# EAGLE board Brainstorm (EAGLE 9.0.1)
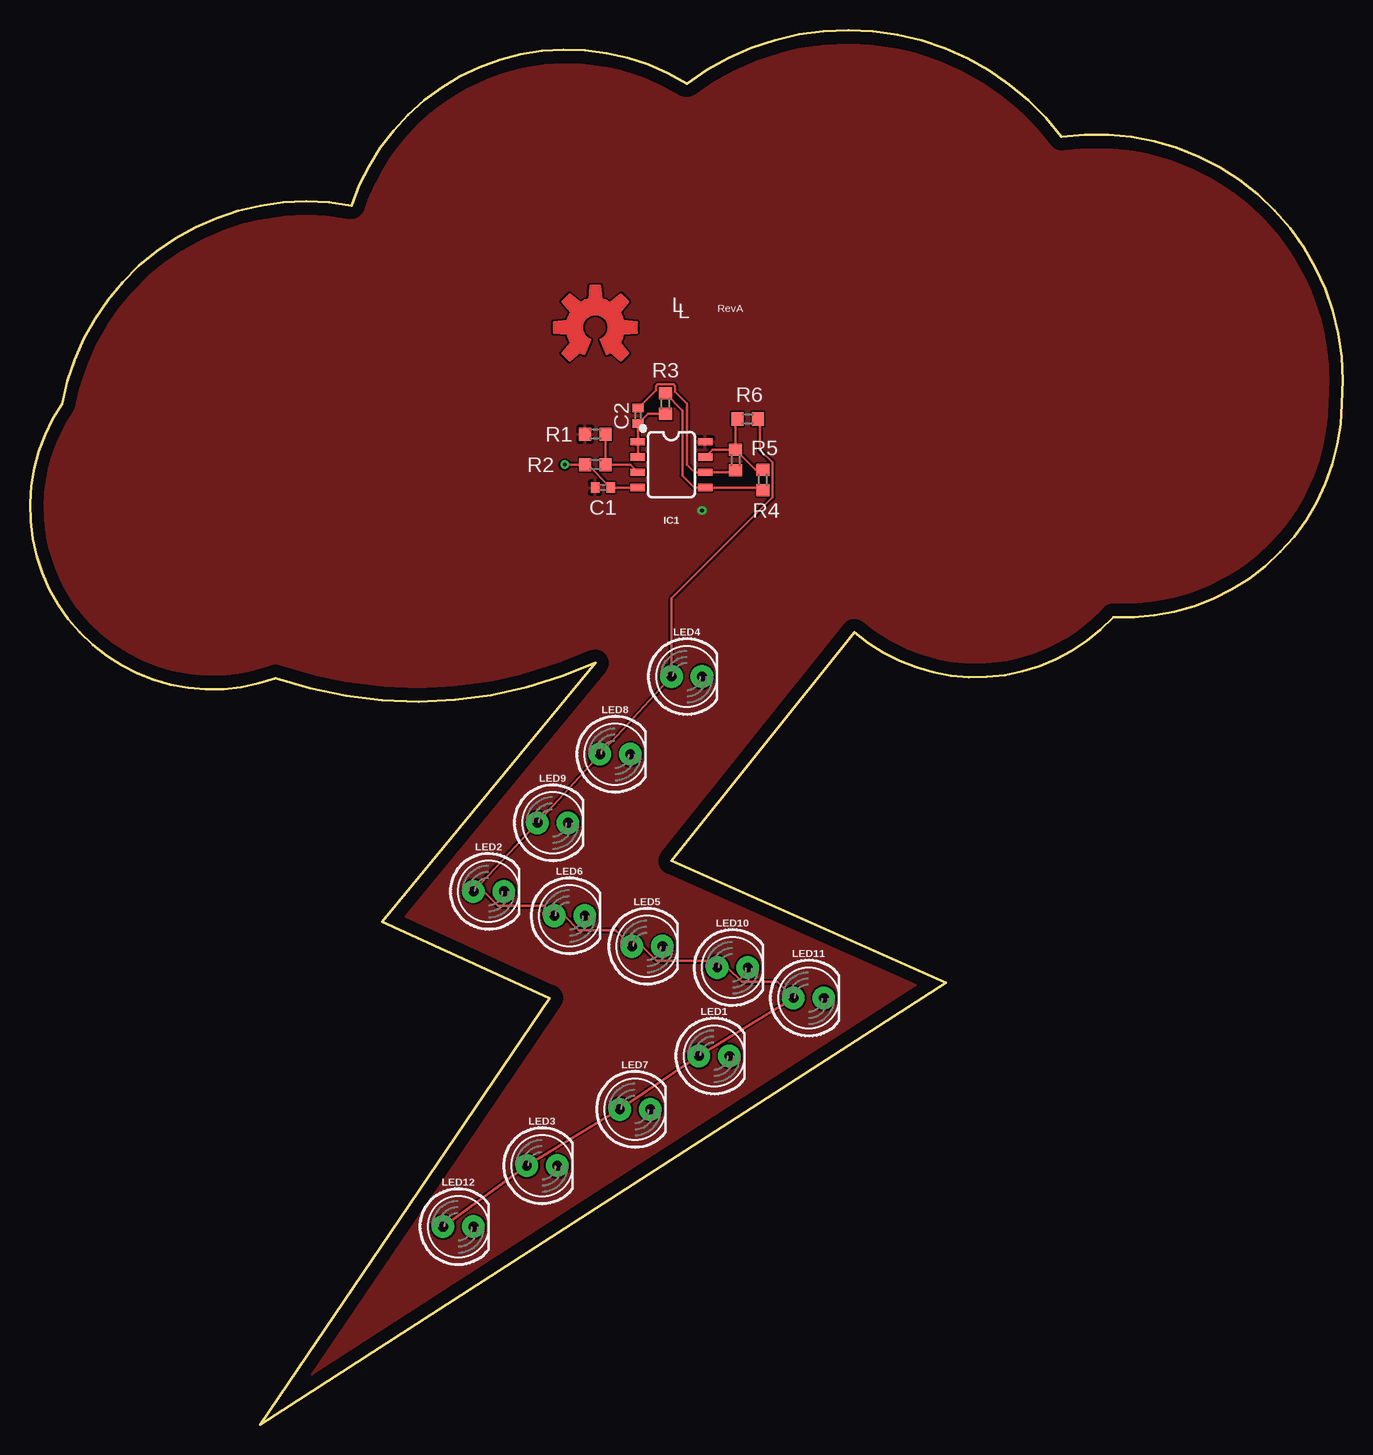
[diagram p0: board, top side]
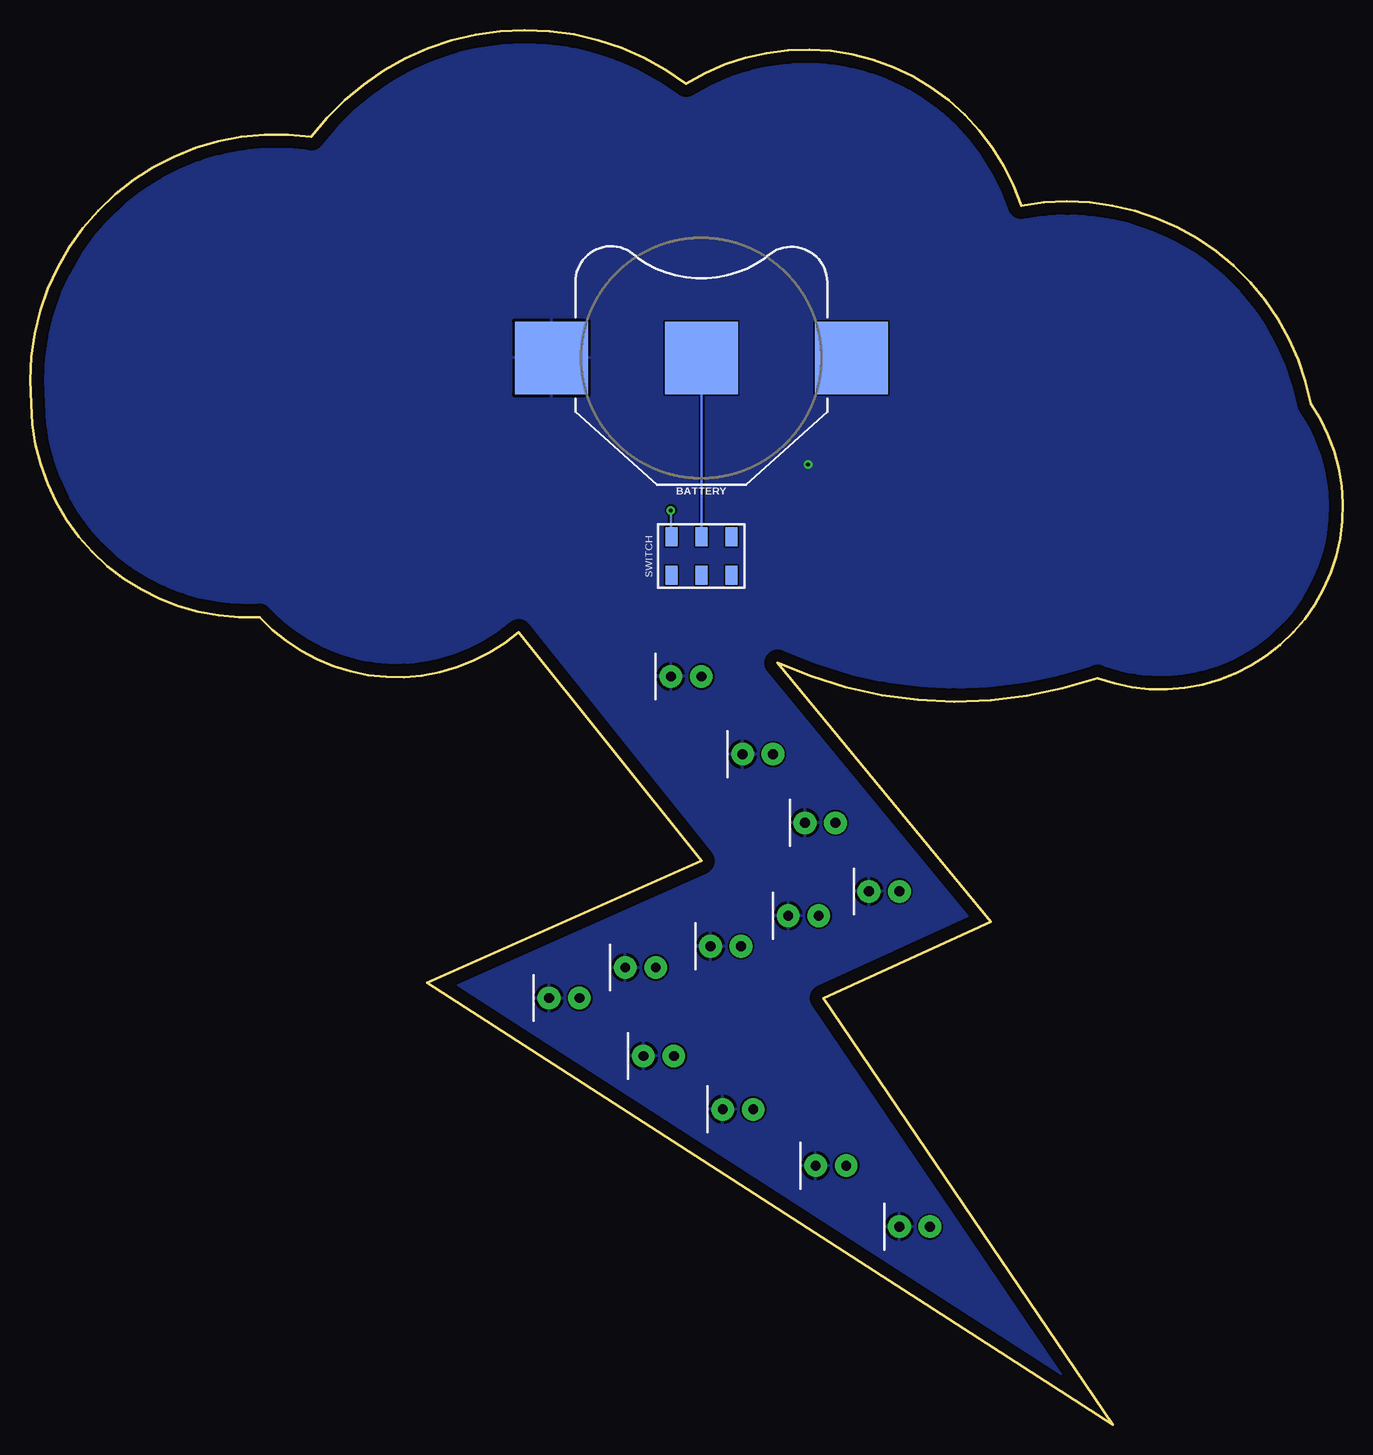
[diagram p1: board, bottom side, seen from below]

Size 109.45 x 116.23 mm. Coordinates in mm from the lower left corner, seen from the top.
Outline: 2.68,85.09 arc-90 26.81,101.6 arc-104 54.75,111.76 arc-90 85.99,107.31 arc-104 109.36,85.09 arc-93 90.31,67.31 arc-88 68.72,66.04 53.48,46.99 76.34,36.83 19.19,0 43.32,35.56 29.35,41.91 47.13,63.5 arc-44 20.46,62.23 arc-145 2.68,85.09
Copper layers (1*16): Top 0.035mm / dielectric 1.5mm / Bottom 0.035mm
Design rules "default": minimum track width 6mil, minimum drill 0.35mm, track to track 6mil, track to pad 6mil, pad to pad 6mil, via to via 6mil, smd to smd 6mil, copper to edge 40mil, drill to drill 6mil, minimum pad ring 10mil, minimum via ring 8mil, stop-mask expansion 4mil, vias tented up to drill 0mil, thermal gap 10mil

## Footprints (pad centres in the part's own frame; a part is rotated, then mirrored left to right if it is on the bottom)
BATTCON_20MM = smd 6.07 x 6.07: 1 -12.5,0; 2 0,0; 3 12.5,0
C0402 = smd 0.7 x 0.9: 1 -0.65,0; 2 0.65,0
SO08 = smd 0.6 x 1.2: 1 -1.905,-2.8; 2 -0.635,-2.8; 3 0.635,-2.8; 4 1.905,-2.8; 5 1.905,2.8; 6 0.635,2.8; 7 -0.635,2.8; 8 -1.905,2.8
LED_5MM = drill 0.813 pad 1.88: A -1.27,0; K 1.27,0
R0603 = smd 1 x 1.1: 1 -0.85,0; 2 0.85,0
SWITCH.00 = smd 1 x 1.6: 1 -2.5,1.6; 2 0,1.6; 3 2.5,1.6; 5 -2.5,-1.6; 6 0,-1.6; 7 2.5,-1.6

## Placement (x,y rotation side)
BATTERY  [BATTCON_20MM]  53.48,88.9 0 bottom
C1  100n  [C0402]  47.77,78.11 0 top
C2  100n  [C0402]  50.69,84.07 90 top
IC1  OP-AMP  [SO08]  53.48,80.01 270 top
LED1  [LED_5MM]  57.04,30.73 0 top
LED2  [LED_5MM]  38.24,44.45 0 top
LED3  [LED_5MM]  42.69,21.59 0 top
LED4  [LED_5MM]  54.75,62.36 0 top
LED5  [LED_5MM]  51.45,39.88 0 top
LED6  [LED_5MM]  44.97,42.42 0 top
LED7  [LED_5MM]  50.43,26.29 0 top
LED8  [LED_5MM]  48.78,55.88 0 top
LED9  [LED_5MM]  43.57,50.16 0 top
LED10  [LED_5MM]  58.56,38.1 0 top
LED11  [LED_5MM]  64.91,35.56 0 top
LED12  [LED_5MM]  35.7,16.51 0 top
LOGO1  OSHW-LOGOL-COPPER  [OSHW-LOGO-L_COPPER]  47.13,91.44 0 top
R1  10k  [R0603]  47.13,82.55 180 top
R2  10k  [R0603]  47.13,80.01 0 top
R3  10k  [R0603]  52.97,85.09 90 top
R4  10k  [R0603]  61.1,78.74 90 top
R5  3.3M  [R0603]  58.81,80.39 90 top
R6  300  [R0603]  59.83,83.82 0 top
SWITCH  SWITCH.JS202011JXQNUPWARDS  [SWITCH.00]  53.48,72.39 0 bottom
U$4  REVISION.A  [REV.A]  57.29,92.71 0 top
U$5  LINNES.LAB.LOGO  [LINNES.LAB.LOGO]  53.48,92.71 0 top

## Library data of the parts
BATTERY = SparkFun-Batteries; PROD_ID: BATT-11519
C1 C2 R1-R6 = CalvEngIO-Passives
IC1 = SparkFun-IC-Amplifiers; PROD_ID: NA-XXXXX
LED1-LED12 = CalvEngIO-LED
LOGO1 U$5 = CalvEngIO-Logos
SWITCH = CalvEngIO-Switches
U$4 = CalvEngIO-Symbols

## Nets
GND: BATTERY.1 C1.2 IC1.4 LED1.K LED2.K LED3.K LED4.K LED5.K LED6.K LED7.K LED8.K LED9.K LED10.K LED11.K LED12.K R2.1
N$2: IC1.3 R1.1 R2.2
N$3: LED1.A LED2.A LED3.A LED4.A LED5.A LED6.A LED7.A LED8.A LED9.A LED10.A LED11.A LED12.A R6.2
N$4: C2.1 IC1.1 IC1.2 R3.1
N$5: C2.2 IC1.6 R5.1
N$6: IC1.5 R3.2 R4.1
N$7: IC1.7 R4.2 R5.2 R6.1
N$9: BATTERY.2 SWITCH.2
PWR: C1.1 IC1.8 R1.2 SWITCH.1

## Tracks (layer width: path | path; a pad name or v marks a point on that pad's centre or on a via)
GND  (via drill 0.3)
  Top 0.203: IC1.4 C1.2 46.51,80.01 R2.1 v44.59,80.01
  pour Bottom: -2.4,129.54 199.53,119.38 193.18,-5.08 147.46,-13.97 1.41,-3.81 -8.75,6.35 -8.75,105.41 -4.94,109.22
N$2
  Top 0.203: IC1.3 50.05,80.01 R2.2 R1.1
N$3
  Top 0.203: R6.2 60.87,84.03 60.87,81.22 61.9,80.19 61.9,77.28 53.48,68.86 LED4.A LED8.A LED9.A LED2.A 37.82,44.45 39.02,43.26 42.86,43.26 LED6.A 44.55,42.42 45.75,41.22 48.83,41.22 LED5.A 51.03,39.88 52.22,38.68 56.71,38.68 LED10.A 58.14,38.1 59.34,36.91 62.29,36.91 LED11.A LED1.A LED7.A LED3.A LED12.A
N$4
  Top 0.203: IC1.2 IC1.1 C2.1 51.5,84.24 R3.1
N$5
  Top 0.203: 56.28,79.39 IC1.6 | C2.2 52.17,86.21 52.17,86.55 52.32,86.69 53.63,86.69 53.78,86.55 53.78,86.06 54.75,85.09 54.75,80.01 55.39,79.38 IC1.6 | IC1.6 58.65,79.38 R5.1
N$6
  Top 0.203: 56.28,78.12 IC1.5 | IC1.5 55.39,78.11 54.39,79.1 54.39,84.52 R3.2 | IC1.5 60.89,78.11 R4.1
N$7
  Top 0.203: IC1.7 56.88,81.24 R5.2 | R5.2 58.81,83.65 R6.1 | R5.2 60.47,79.59 R4.2
N$9
  Bottom 0.203: BATTERY.2 SWITCH.2
PWR  (via drill 0.3)
  Bottom 0.203: SWITCH.1 56.02,74.03 v56.02,76.2
  pour Top: -4.94,111.76 -4.94,-3.81 196.99,-12.7 196.99,110.49 -3.67,119.38